# Altium PCB InWall_PCB3.PcbDoc
Units mm, origin at the board's own origin, x right, y up, seen from the top; angles counter-clockwise.
Board outline 51.7 x 50.3 mm, 2 copper layers (Top Layer, Bottom Layer); 34 components, 20 nets, 128 pads, 6 vias.
Unrouted connection lines stored in the file: 3.
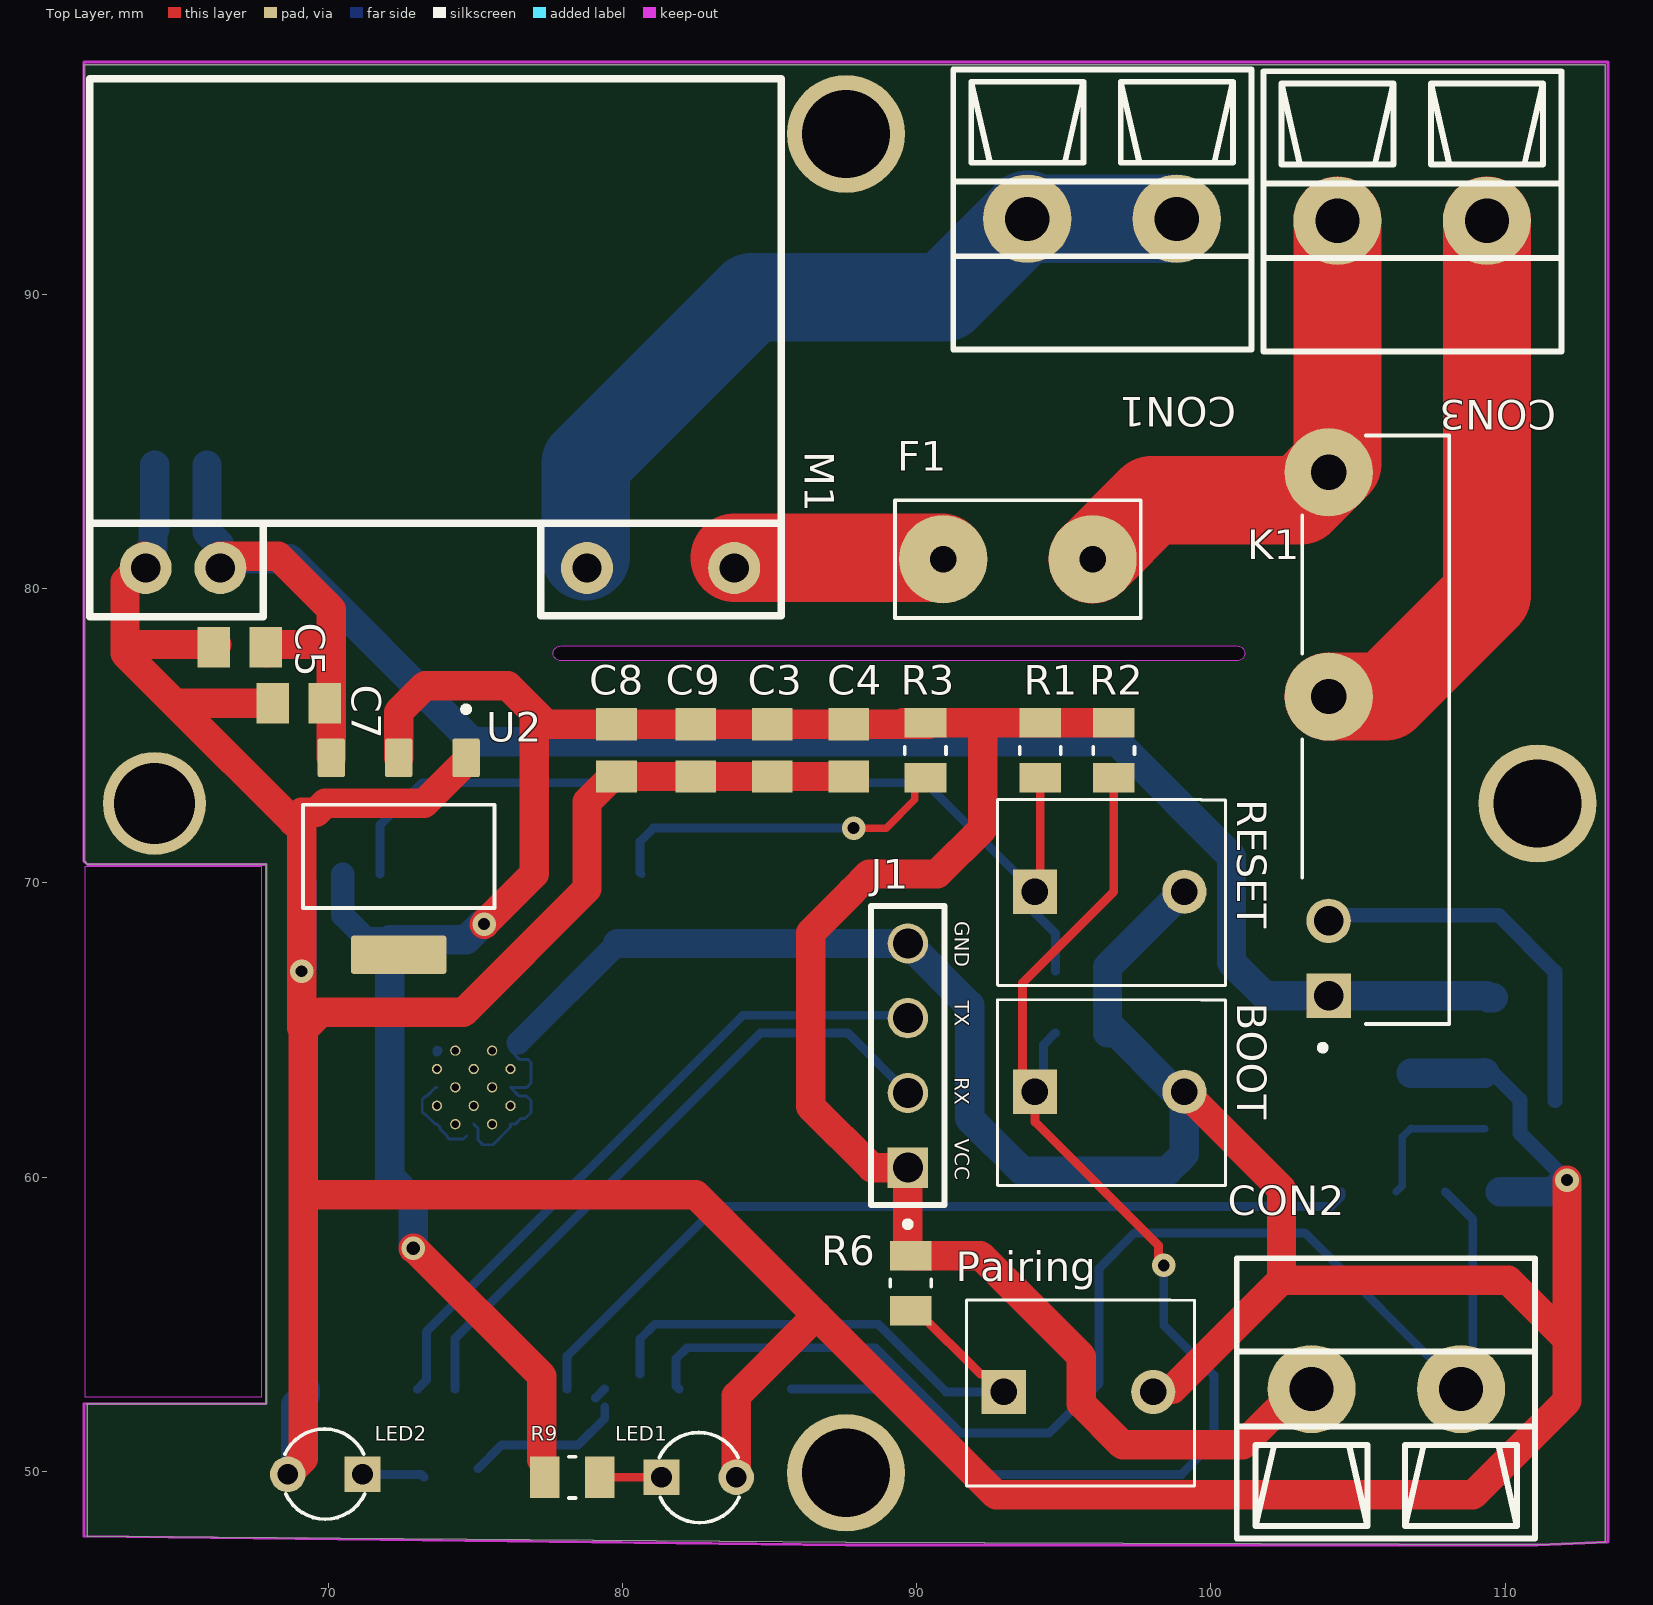
[diagram p0: Top Layer view]
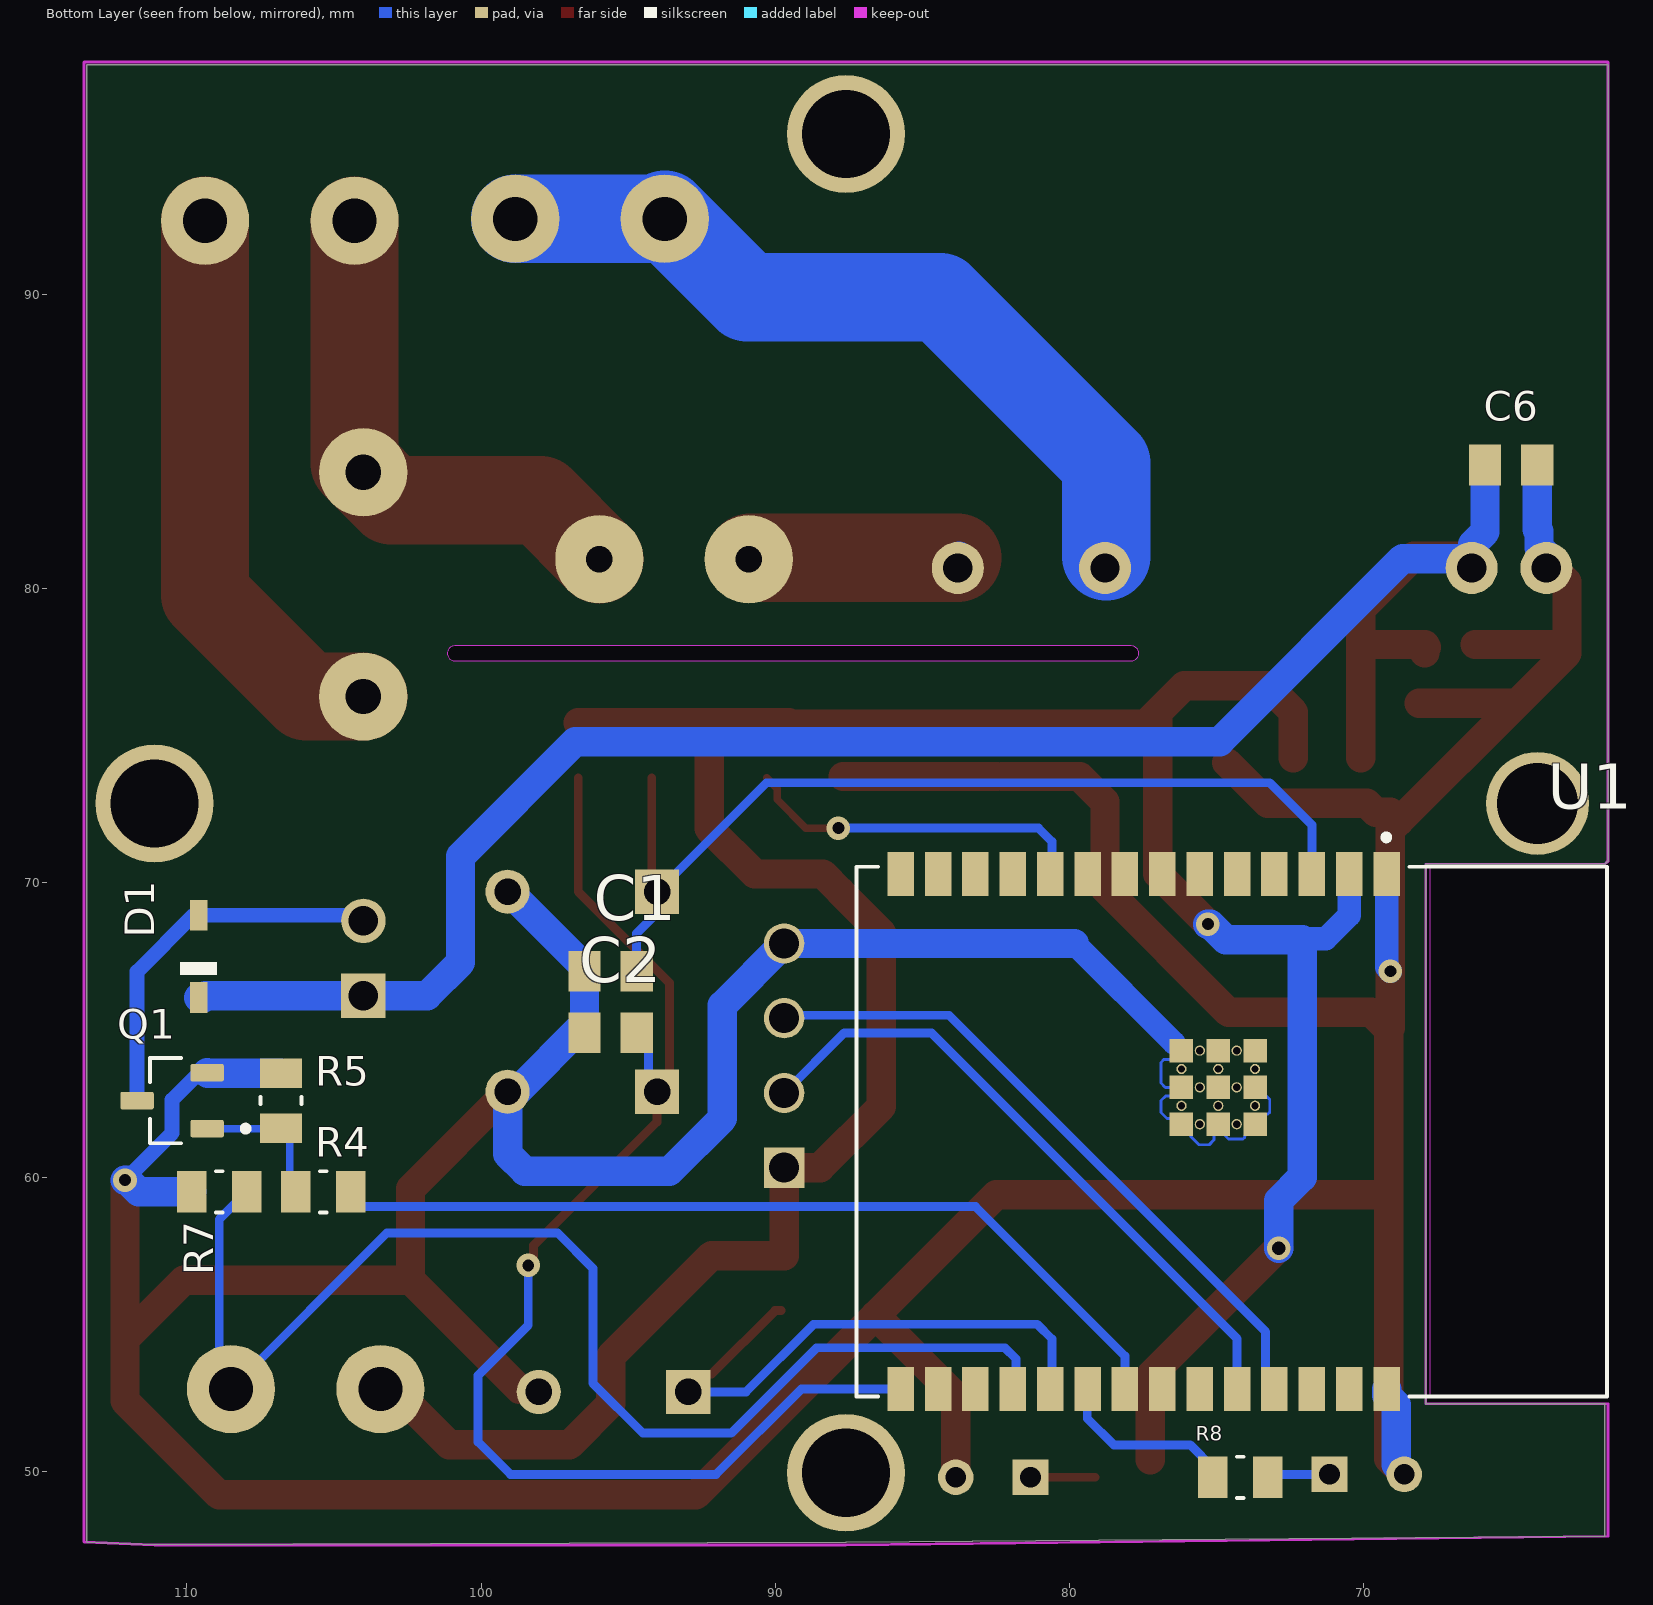
[diagram p1: Bottom Layer view, seen from below]
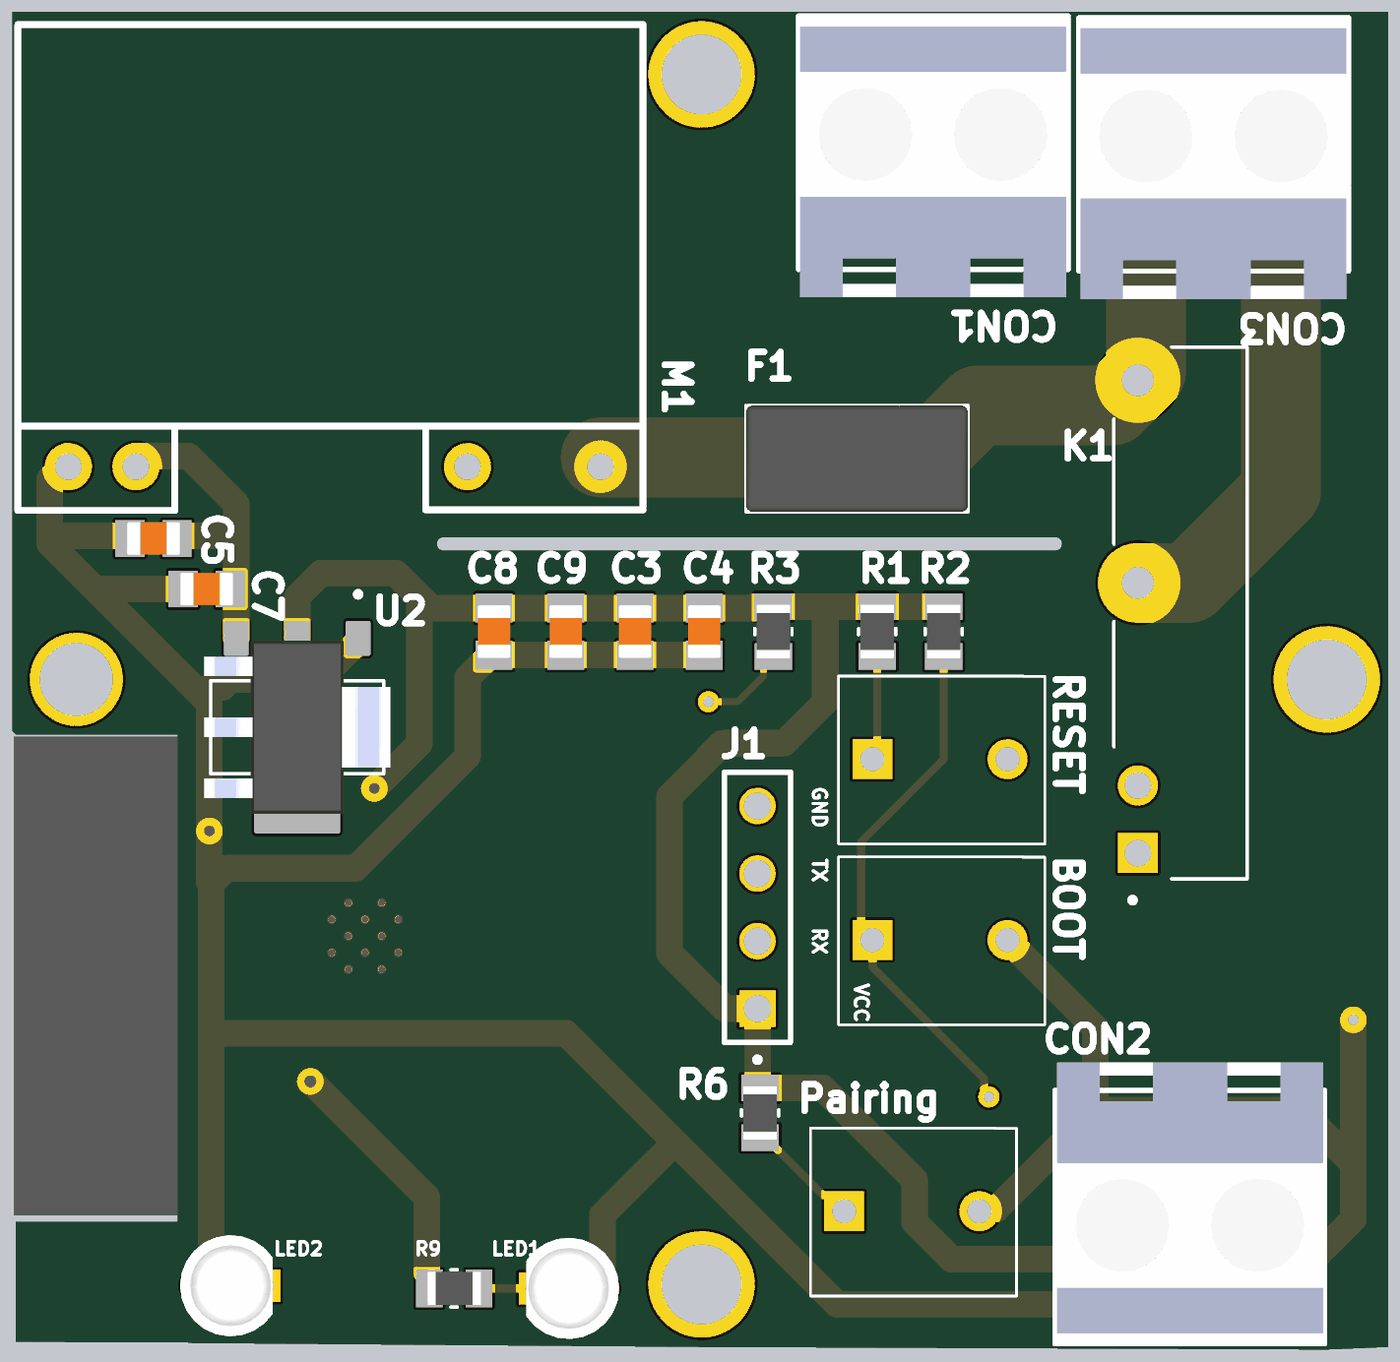
[diagram p2: 3D render of the assembled board from above, using the file's embedded part models]
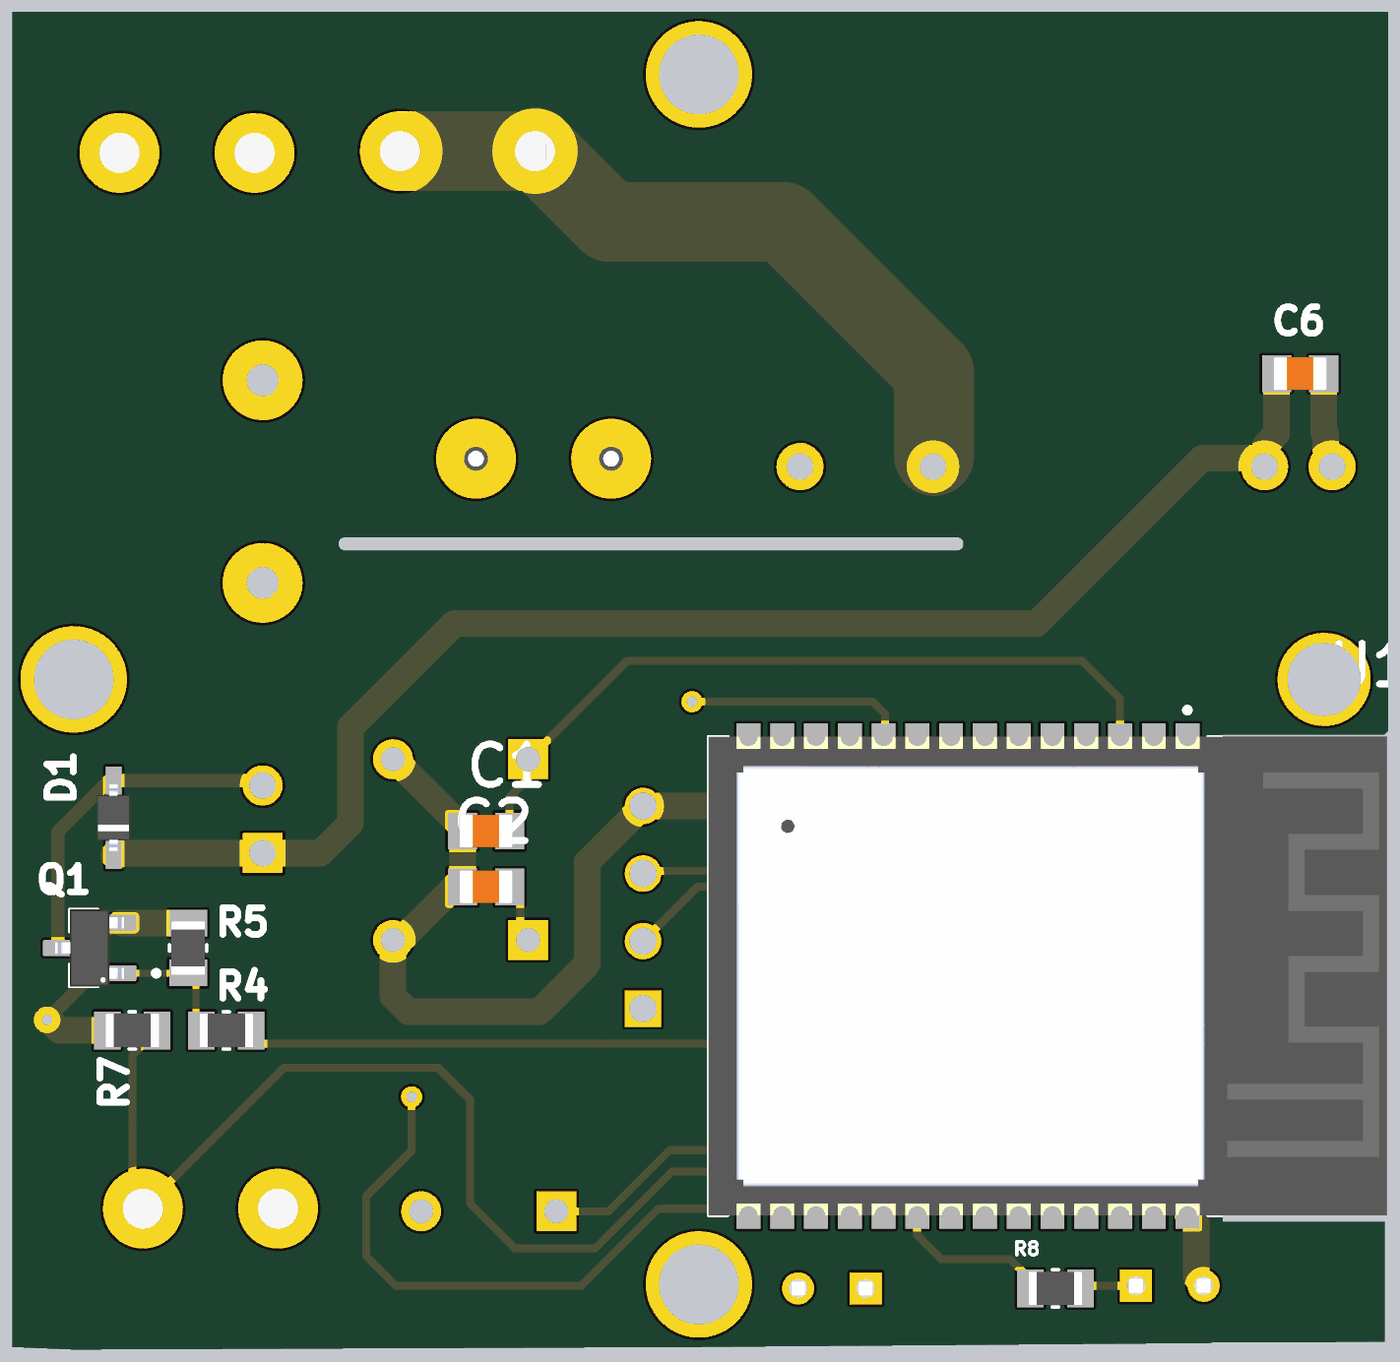
[diagram p3: 3D render of the assembled board from below, using the file's embedded part models]

## Layer stack, top to bottom
Top Solder: solder mask 0.0102, Solder Resist, Dk 3.5
Top Layer: signal copper 0.0356
Dielectric 1: dielectric 0.32, FR-4, Dk 4.8
Bottom Layer: signal copper 0.0356
Bottom Solder: solder mask 0.0102, Solder Resist, Dk 3.5

## Board outline
61.825,47.796 61.825,52.3 67.9,52.3 67.9,70.625 61.825,70.625 61.7,70.75 61.7,70.8 61.7,97.8 113.4,97.8 113.4,47.596 111.1,47.5 87.6,47.596
cut-out: 77.9,77.55 cw(c77.9,77.8) 77.9,78.05 100.9,78.05 cw(c100.9,77.8) 101.15,77.8 cw(c100.9,77.8) 100.9,77.55

## Design rules (kind name [scope] priority, off if disabled: settings)
Clearance [All] p1: gap=0.3 ignorepadtopadclearanceinfootprint=FALSE
PolygonConnect [All] p1: connectstyle=Relief reliefconductorwidth=0.254 reliefentries=4 polygonreliefangle="90 Angle" airgapwidth=0.254
RoutingVias [All] p1: holewidth=0.71 width=1.27 viastyle="Through Hole" minholewidth=0.4 minwidth=0.8 maxholewidth=1.5 maxwidth=1.27
SolderMaskExpansion [All] p1: expansion=0.102 istentingtop=FALSE
Width [All] p1: maxlimit=3.2 minlimit=0.1 preferedwidth=0.3 minimp=50.000000 maximp=50.000000 favimp=50.000000
30 further rules are at their usual default settings.

## Components (designator, comment, footprint, x,y, rotation, side; value= is the part's Value field where it differs from the comment)
BOOT "Push Button" "Push Button" 96.56,62.9 r270 top
C1 "100 nF" CAPC2012X90N 95.6,67 r180 bottom
C2 "100 nF" CAPC2012X90N 95.6,64.9 r180 bottom
C3 "100 nF/ 50V" CAPC2012X90N 85.1,74.5 r90 top
C4 "10 uF/ 25V" CAPC2012X90N 87.7,74.5 r90 top
C5 "100 nF/ 50V" CAPC2012X90N 67,78 r0 top
C6 "100 nF" CAPC2012X90N 65,84.2 r0 bottom
C7 "10 uF/ 25V" CAPC2012X90N 69,76.1 r0 top
C8 "10 uF/ 25V" CAPC2012X90N 79.8,74.5 r90 top
C9 "100 nF" CAPC2012X90N 82.5,74.5 r90 top
CON1 "CON2" TB_2 96.3,92.565 r180 top
CON2 "CON2" TB_2 105.96,52.8 r0 top
CON3 "CON2" TB_2 106.84,92.5 r180 top
D1 "1N4148WS" SODFL2512X100N 109.6,67.5 r90 bottom
F1 "0697H1000-02" FUSRR508W60L835T400H810 93.44,81 r180 top
J1 "HTSW-104-07-G-S" SAMTEC_HTSW-104-07-G-S 89.7,64.13 r270 top
K1 "HF49FD/005-1H12T" RELAY_HF49FD/005-1H12T 105.6,75.2 r90 top
LED1 "LED_Power" LEDRD254W50D305H520P 82.6,49.8 r0 top
LED2 "LED_Switch" LEDRD254W50D305H520P 69.9,49.9 r180 top
M1 "WX_DC12003" WX-DC12003 63.8,80.7 r0 top
Pairing "Push Button" "Push Button" 95.5,52.7 r270 top
Q1 "AO3400-5.8A" SOT95P260X140-3N 110.5,62.6 r0 bottom
R1 "10K" RESC2012X65N 94.2,74.5 r270 top
R2 "10K" RESC2012X65N 96.7,74.5 r270 top
R3 "3.3K" RESC2012X65N 90.3,74.5 r90 top
R4 "100 Ohm" RESC2012X65N 105.365,59.5 r0 bottom
R5 "10K" RESC2012X65N 106.8,62.6 r270 bottom
R6 "10K" RESC2012X65N 89.8,56.4 r270 top
R7 "10K" RESC2012X65N 108.9,59.5 r0 bottom
R8 "330" RESC2012X65N 74.2,49.8 r180 bottom
R9 "330" RESC2012X65N 78.3,49.8 r0 top
RESET "Push Button" "Push Button" 96.56,69.7 r270 top
U1 "ESP32-C6-WROOM-1-N8" XCVR_ESP32-C6-WROOM-1-N8 74.49,61.545 r270 bottom
U2 "AMS1117-3.3" SOT229P700X180-4N 72.4,70.9 r270 top

## Footprints (in the part's own frame and the unit in brackets; to place one, negate y for a bottom-side part, rotate by r counter-clockwise, add the part's x,y. Pads: shape width x height; smd on the part's side, far side on the other; paste and mask are expansions set on the pad)
CAPC2012X90N [mm]
  rect 1.1x1.38 smd: 1(-0.885,0) 2(0.885,0)
  body extent -1,-0.63 1,0.63, height 0.9
FUSRR508W60L835T400H810 [mm]
  round 3 hole 0.9: 1(-2.54,0) 2(2.54,0)
  silkscreen extent -4.18,-2 4.18,2, body extent -4.18,-2 4.18,2, height 8.1
LEDRD254W50D305H520P [mm]
  rect 1.208x1.208 / inner round 1.208 / far side rect 1.208x1.208 hole 0.7: A(-1.27,0)
  round 1.208 hole 0.7: C(1.27,0)
  silkscreen extent -1.34,-1.54 1.36,1.52, body extent -1.59,-1.9 1.91,1.9, height 6.71
"Push Button" [mm]
  rect 1.5x1.5 hole 0.9: 1(0,-2.54)
  round 1.5 hole 0.9: 2(0,2.54)
  silkscreen extent -3.13,-3.81 3.19,3.94
RELAY_HF49FD/005-1H12T [mm]
  rect 1.508x1.508 hole 1: 1(-9.03,1.6)
  round 1.508 hole 1: 2(-6.49,1.6)
  round 3 hole 1.2: 3(1.13,1.6) 4(8.75,1.6)
  silkscreen extent -10.9,-2.5 10,2.5
RESC2012X65N [mm]
  rect 1x1.42 smd: 1(-0.935,0) 2(0.935,0)
  silkscreen extent -0.12,-0.7 0.12,0.7, body extent -1,-0.63 1,0.63, height 0.65
SAMTEC_HTSW-104-07-G-S [mm]
  rect 1.37x1.37 / inner round 1.37 / far side rect 1.37x1.37 hole 1.02: 01(3.81,0)
  round 1.37 hole 1.02: 02(1.27,0) 03(-1.27,0) 04(-3.81,0)
  silkscreen extent -5.08,-1.24 5.83,1.24
SODFL2512X100N [mm]
  rect 1.05x0.6 smd: A(1.4,0) C(-1.4,0)
  silkscreen extent -0.63,-0.63 -0.2,0.63, body extent -1.25,-0.63 1.25,0.63, height 1.1
SOT95P260X140-3N [mm]
  rrect25% 1.14x0.6 smd: 1(-1.19,0.95) 2(-1.19,-0.95) 3(1.19,0)
  silkscreen extent -2.6,-1.45 0.75,1.45, body extent -1.3,-1.45 1.3,1.45, height 1.4
SOT229P700X180-4N [mm]
  rrect15% 1.31x0.93 smd: 1(-3.345,2.29) 2(-3.345,0) 3(-3.345,-2.29)
  rrect15% 1.31x3.24 smd: 4(3.345,0)
  silkscreen extent -5.1,-3.25 1.75,3.25, body extent -3.25,-3.5 3.25,3.5, height 1.8
TB_2 [mm]
  round 3 hole 1.5 mask+0.102: 1(-2.54,0) 2(2.54,0)
  silkscreen extent -5.08,-5.08 5.05,4.45, body extent -5,-5 5,5.5, height 14
WX-DC12003 [mm] "220V AC to 5V DC converter"
  round 1.77 hole 1: 1(0,0) 2(2.54,0) 3(15,0) 4(20,0)
  silkscreen extent -1.9,-1.65 21.6,16.63
XCVR_ESP32-C6-WROOM-1-N8 [mm]
  rect 1.5x0.9 smd: 1(-8.75,5.26) 2(-8.75,3.99) 3(-8.75,2.72) 4(-8.75,1.45) 5(-8.75,0.18) 6(-8.75,-1.09) 7(-8.75,-2.36) 8(-8.75,-3.63) 9(-8.75,-4.9) 10(-8.75,-6.17) 11(-8.75,-7.44) 12(-8.75,-8.71) 13(-8.75,-9.98) 14(-8.75,-11.25) 15(8.75,-11.25) 16(8.75,-9.98) 17(8.75,-8.71) 18(8.75,-7.44) 19(8.75,-6.17) 20(8.75,-4.9) 21(8.75,-3.63) 22(8.75,-2.36) 23(8.75,-1.09) 24(8.75,0.18) 25(8.75,1.45) 26(8.75,2.72) 27(8.75,3.99) 28(8.75,5.26)
  rect 0.8x0.8 smd: 29_1(-2.755,0.79) 29_2(-1.505,0.79) 29_3(-0.255,0.79) 29_4(-2.755,-0.46) 29_5(-1.505,-0.46) 29_6(-0.255,-0.46) 29_7(-2.755,-1.71) 29_8(-1.505,-1.71) 29_9(-0.255,-1.71)
  round 0.35 hole 0.25 mask+0: 30_1(-2.13,0.79) 30_2(-0.88,0.79) 30_3(-2.755,0.165) 30_4(-1.505,0.165) 30_5(-0.255,0.165) 30_6(-2.13,-0.46) 30_7(-0.88,-0.46) 30_8(-2.755,-1.085) 30_9(-1.505,-1.085) 30_10(-0.255,-1.085) 30_11(-2.13,-1.71) 30_12(-0.88,-1.71)
  Keep-Out Layer region: 9,6.75 -9,6.75 -9,12.75 9,12.75
  silkscreen extent -10.1,-12.75 9,12.75, body extent -9,-12.75 9,12.75, height 3.25

## Part data
C1 C2 C3 C4 C5 C6 C7 C8 C9: library part VJ0805Y104KXXCW1BC, "Capacitor: ceramic; MLCC; 100nF; 25V; X7R; Â±10%; SMD; 0805", Package="0805-2 VISHAY", Check_prices=https://www.snapeda.com/parts/VJ0805Y104KXXCW1BC/Vishay/view-part/?ref=eda, MF="Vishay Vitramon", MP=VJ0805Y104KXXCW1BC, SnapEDA_Link=https://www.snapeda.com/parts/VJ0805Y104KXXCW1BC/Vishay/view-part/?ref=snap
D1: "Diode Standard 75V 300mA (DC) Surface Mount SOD-323", Package="SOD-323FL-2 ON Semiconductor", Availability="In Stock", MF="ON Semiconductor", MP=1N4148WS, Price=None, Purchase-URL=https://pricing.snapeda.com/search/part/1N4148WS/?ref=eda
F1: "2-Pin Radial Fuse", Package="Radial Box  Bel Fuse", Check_prices=https://www.snapeda.com/parts/0697H1000-02/Bel+Circuit+Protection/view-part/?ref=eda, MF="Bel Fuse", MP=0697H1000-02, SnapEDA_Link=https://www.snapeda.com/parts/0697H1000-02/Bel+Circuit+Protection/view-part/?ref=snap
J1 Q1: Package=None, Availability=Unavailable, Price=None
  J1: MP=HTSW-104-07-G-S
  Q1: MF="{'manufacturer': u'MDD'}", MP=AO3400-5.8A
K1: "Relay: electromagnetic; SPST-NO; Ucoil: 5VDC; 5A/250VAC; 5A/30VDC", Package=None, Availability=Unavailable, MF=Hongfa, MP=HF49FD/005-1H12T, Price=None, SnapEDA_Link=https://www.snapeda.com/parts/HF49FD/005-1H12T/Hongfa/view-part/2753221/?ref=snap
LED1 LED2: library part OVLAW4CB7, "Ovlaw4Cb7 White LED 3mm (T-1) Round Lens Through Hole Package", Package=Package, Check_prices=https://www.snapeda.com/parts/OVLAW4CB7/TT+Electronics%252FOptek/view-part/?ref=eda, MF="TT Electronics/Optek", MP=OVLAW4CB7, SnapEDA_Link=https://www.snapeda.com/parts/OVLAW4CB7/TT+Electronics%252FOptek/view-part/?ref=snap
R1 R2 R3 R4 R5 R6 R7 R8 R9: library part RN73C2A5K11BTD, "RES SMD 5.11KOHM 0.1% 1/10W 0805", Package=0805, Power_Rating=".1 W", Resistance=5.11K, Tolerance=.1%, Check_prices=https://www.snapeda.com/parts/RN73C2A5K11BTD/TE+Connectivity+Passive+Product/view-part/?ref=eda, EU_RoHS_Compliance=Compliant, MF="TE Connectivity", MP=RN73C2A5K11BTD, SnapEDA_Link=https://www.snapeda.com/parts/RN73C2A5K11BTD/TE+Connectivity+Passive+Product/view-part/?ref=snap
U1: "Multiprotocol Modules ESP32-C6 module, Wi-Fi 6 in 2.4 GHz band, Bluetooth 5, Zigbee 3.0 and Thread. ESP34-WROOM Compatible - ENGINEERING SAMPLE", Package="SMD-28 Espressif Systems", Check_prices=https://www.snapeda.com/parts/ESP32-C6-WROOM-1-N8/Espressif+Systems/view-part/?ref=eda, MF="Espressif Systems", MP=ESP32-C6-WROOM-1-N8, SnapEDA_Link=https://www.snapeda.com/parts/ESP32-C6-WROOM-1-N8/Espressif+Systems/view-part/?ref=snap
U2: "Sot223/Pkg 1-Amp 3.3-Volt Low Drop Out Voltage Regulatator", Package="SOT-223 Seeed Technology", Check_prices=https://www.snapeda.com/parts/AMS1117-3.3/Advanced+Monolithic+Systems/view-part/?ref=eda, MF="Advanced Monolithic Systems", MP=AMS1117-3.3, SnapEDA_Link=https://www.snapeda.com/parts/AMS1117-3.3/Advanced+Monolithic+Systems/view-part/?ref=snap

## Free pads (board coordinates)
  round 4 hole 3: 1(87.6,95.45) 2(111.1,72.7) 3(87.6,49.95)
  round 3.5 hole 2.75: 4(64.1,72.7)

## Via types
v1: diameter 0.8, hole 0.4, Top Layer to Bottom Layer, 5 vias
v2: diameter 0.8, hole 0.45, Top Layer to Bottom Layer, 1 vias

## Nets (pads, with @x,y where several pads share a name; then routed paths per layer and width w, separated by ;. In a path a pad name is that pad's centre, name@x,y a point inside that pad or via, vN(x,y) a via of type N, cw(c..) or ccw(c..) an arc to the next point about the centre after c; other vN are vias at no path point)
3V3: C3.2 C4.2 C8.2 C9.2 CON2.1 J1.01 R1.1 R2.1 R3.2 R6.1 R9.1 U1.2 U2.2 | length 104.2
  Top Layer w1: U2.2 72.4,75.8 73.3,76.7 76.1,76.7 77,75.8 ; v2(72.895,57.584) 72.916,57.584 77.265,53.235 R9.1@77.265,50.4 ; v1(75.3,68.6) 77,70.3 77,75.8 ; R3.2@90.4,75.385 89.5,75.385 ; R2.1 R1.1 92.25,75.435 ; CON2.1 102.977,52.8 101.077,50.9 97,50.9 95.6,52.3 95.6,53.9 92.165,57.335 R6.1 89.7,57.335 J1.01 88.48,60.32 86.4,62.4 86.4,68.3 87.8,69.7 87.8,69.714 88.386,70.3 90.7,70.3 92.25,71.85 92.25,75.435 ; 77,75.8 77.415,75.385 C8.2 C9.2 C3.2 C4.2 89.5,75.385 ; 89.5,75.385 89.55,75.435 R3.2 92.25,75.435
  Bottom Layer w0.8: U1.2 70.5,68.9 71.3,68.1 72.064,68.1 72.1,68.064
  Bottom Layer w1: v2(72.895,57.584) 72.895,59.205 72.1,60 72.1,68.064 74.691,68.064 75.227,68.6 v1(75.3,68.6)
5V: C5.2 C6.2 C7.2 D1.C K1.1 M1.2 U2.3 | length 67.1
  Top Layer w0.254: C5.2@67.885,77.86 C5.2
  Top Layer w1: M1.2@66.3,81.1 68.3,81.1 70.11,79.29 70.11,78 ; C5.2 C5.2@67.935,78 ; C5.2@67.935,77.81 C5.2@67.935,78 ; C5.2@67.935,78.1 C5.2@67.935,78 ; C5.2@68.035,78.1 70.01,78.1 70.11,78 ; U2.3 70.11,76.1 70.11,78
  Bottom Layer w1: C6.2 65.885,81.925 66.3,81.51 66.3,81.1 66.385,81.015 68.685,81.015 74.9,74.8 96.8,74.8 100.7,70.9 100.7,67.3 101.83,66.17 K1.1 109.355,66.17 109.425,66.1 D1.C
BOOT: BOOT.1 C2.2 R2.2 U1.15 | length 44.9
  Top Layer w0.3: BOOT.1@93.6,62.3 94.024,62.3 94.024,61.876 98.214,57.686 98.214,57.186 v1(98.4,57) ; BOOT.1 93.6,63.32 93.6,66.6 96.7,69.7 R2.2
  Bottom Layer w0.3: U1.15 89.122,52.795 92.017,49.9 99,49.9 100.1,51 100.1,53.269 98.4,54.969 v1(98.4,57) ; BOOT.1@93.8,62.8 94.315,63.315 94.315,64.5 C2.2
EN: C1.2 R1.2 RESET.1 U1.3 | length 32
  Top Layer w0.3: RESET.1 94.2,69.88 R1.2
  Bottom Layer w0.3: U1.3 71.77,71.97 73.2,73.4 90.3,73.4 RESET.1@93.8,69.9 ; RESET.1@94,69 94.715,68.285 C1.2
GND: BOOT.2 C1.1 C2.1 C3.1 C4.1 C5.1 C6.1 C7.1 C8.1 C9.1 J1.04 LED1.C LED2.C M1.1 Pairing.2 Q1.2 R5.1 R7.2 RESET.2 U1.1 U1.28 U1.29_1 U1.29_2 U1.29_3 U1.29_4 U1.29_5 U1.29_6 U1.29_7 U1.29_8 U1.29_9 U2.1 | length 228.2
  Top Layer w1: M1.1@63.76,81.1 63.76,80.892 63.1,80.232 63.1,77.8 ; C5.1@66.215,78.1 63.4,78.1 63.1,77.8 ; C7.1 64.8,76.1 ; LED2.C 69.161,50.431 69.161,59.4 ; U2.1@74.655,74.09 73.265,72.7 69.9,72.7 69.6,72.4 69.1,72.4 69.1,71.8 ; C9.1@82.3,73.615 C8.1 79.66,73.615 78.8,72.755 78.8,69.8 74.6,65.6 69.747,65.6 69.161,65.014 ; C9.1 C3.1 C4.1 ; LED1.C 83.87,52.57 86.6,55.3 ; Pairing.2 98.136,52.796 98.696,52.796 102.4,56.5 ; BOOT.2@99.263,62.737 102.4,59.6 102.4,56.5 ; v1(112.1,59.9) 112.1,54.5 ; 63.1,77.8 64.8,76.1 ; 64.8,76.1 68.8,72.1 69.1,71.8 ; 69.1,71.8 v1(69.1,67) 69.1,65.075 69.161,65.014 ; 69.161,59.4 69.161,65.014 ; 69.161,59.4 82.5,59.4 86.6,55.3 ; 86.6,55.3 92.7,49.2 108.9,49.2 112.1,52.4 112.1,54.5 ; 102.4,56.5 110.1,56.5 112.1,54.5
  Bottom Layer w0.1: U1.29_2 73.648,63.05 73.35,62.752 73.311,62.752 73.2,62.641 73.2,62.209 73.259,62.15 73.298,62.15 73.648,61.8 U1.29_3 73.8,61.7 73.8,61.648 74.05,61.398 74.05,61.359 74.109,61.3 74.6,61.3 74.7,61.4 ; U1.29_6 75.1,61.65 75.1,61.259 75.259,61.1 75.6,61.1 76.2,61.7 U1.29_9 76.359,61.8 76.55,61.991 76.691,61.991 76.9,62.2 76.9,62.6 76.748,62.752 76.498,62.752 U1.29_8 76.75,63.05 76.9,63.2 76.9,63.9 76.798,64.002 76.498,64.002 U1.29_7
  Bottom Layer w0.254: U1.29_1@73.7,64.231 U1.29_1@73.7,64.254
  Bottom Layer w0.3: U1.29_1@73.7,64.254 U1.29_1 U1.29_1@73.746,64.3
  Bottom Layer w0.5: Q1.2 109.36,63.5 109.63,63.5 110.5,62.63 110.5,61.5 v1(112.1,59.9)
  Bottom Layer w0.8: v1(69.1,67) 69.23,67.13 69.23,70.015 U1.1@69.2,70.045 ; U1.29_7@76.465,64.565 79.84,67.94
  Bottom Layer w1: M1.1@63.76,81.1 64.05,81.39 64.05,81.942 64.115,82.007 C6.1 ; LED2.C 68.63,49.956 68.9,50.226 68.9,52.265 69.23,52.595 U1.28 ; 79.84,67.94 J1.04 91.8,65.84 91.8,62 93.6,60.2 98.514,60.2 99.1,60.786 BOOT.2 ; C2.1@96.535,64.95 C2.1 C1.1 96.485,67.14 99.045,69.7 RESET.2 RESET.2@99.004,69.604 ; C2.1@96.535,65.165 BOOT.2@98.8,62.9 ; R5.1 109.295,63.535 Q1.2 ; R7.2 111.627,59.5 112.027,59.9 v1(112.1,59.9)
L_out: CON3.1 K1.3 | length 19.5
  Top Layer w3: K1.3 105.93,76.33 109.38,79.78 CON3.1
LED: R8.1 U1.20 | length 5.8
  Bottom Layer w0.3: R8.1@75.1,50.1 75.9,50.9 78.5,50.9 79.4,51.8 U1.20@79.4,52.2 ; U1.20@79.09,52.495 U1.20
NetD1_A: D1.A K1.2 Q1.3 | length 12.9
  Bottom Layer w0.5: K1.2 104.097,68.807 104.456,68.807 104.549,68.9 109.775,68.9 111.69,66.985 Q1.3
NetF1_2: F1.2 M1.4 | length 7.2
  Top Layer w3: M1.4@83.81,81.05 F1.2@90.85,81.05
  Bottom Layer w1: M1.4@83.76,81.1 M1.4@83.81,81.05 ; F1.2@90.85,81.05 F1.2
NetLED1_A: LED1.A R9.2 | length 2.2
  Top Layer w0.3: R9.2@79.135,49.8 LED1.A
NetLED2_A: LED2.A R8.2 | length 2.1
  Bottom Layer w0.3: LED2.A 73.165,49.9 R8.2
NetQ1_1: Q1.1 R4.2 R5.2 | length 4.9
  Bottom Layer w0.254: R4.2 106.5,59.7 106.5,61.365 R5.2 106.815,61.65 Q1.1
NetR3_1: R3.1 U1.10 | length 11.9
  Top Layer w0.254: v1(87.858,71.86) 88.96,71.86 89.933,72.833 89.933,73.198 R3.1
  Bottom Layer w0.254: U1.10@80.605,70.35 U1.10
  Bottom Layer w0.3: U1.10@80.605,70.35 80.605,71.405 81.06,71.86 v1(87.858,71.86)
NULL: CON1.1 CON1.2 M1.3 | length 26.9
  Top Layer w2.5: CON1.2@93.76,92.429 CON1.2 ; CON1.1 CON1.1@98.89,92.515
  Bottom Layer w3: M1.3@78.76,81.1 78.76,84.26 84.4,89.9 90.96,89.9 CON1.2@93.76,92.7 ; CON1.2 CON1.1
Pairing: Pairing.1 R6.2 U1.19 | length 19
  Top Layer w0.3: R6.2 90.01,55.465 92.175,53.3 92.36,53.3 Pairing.1
  Bottom Layer w0.3: U1.19@80.6,53.3 80.6,54.5 81.1,55 88.7,55 91,52.7 Pairing.1
Phase: CON3.2 F1.1 K1.4 | length 17.9
  Top Layer w3: F1.1 97.98,83 103.05,83 104.3,84.25 CON3.2
Relay_Signal: R4.1 U1.21 | length 29.8
  Bottom Layer w0.3: U1.21 78.12,53.92 83.2,59 104.08,59 104.43,59.35 R4.1
RXD: J1.02 U1.24 | length 22.3
  Bottom Layer w0.3: U1.24 74.31,54.51 84.7,64.9 87.66,64.9 J1.02
S1: CON2.2 R7.1 U1.18 | length 43.1
  Bottom Layer w0.3: U1.18 81.819,52.906 81.819,53.819 82.2,54.2 88.6,54.2 91.5,51.3 94.5,51.3 96.2,53 96.2,56.9 97.4,58.1 103.2,58.1 CON2.2 ; R7.1 108.9,58.565 CON2.2@108.9,53.2
TXD: J1.03 U1.25 | length 22.9
  Bottom Layer w0.3: U1.25 73.34,53.095 73.34,54.74 84.1,65.5 89.6,65.5 J1.03
pads on no net: U1.4 U1.5 U1.6 U1.7 U1.8 U1.9 U1.11 U1.12 U1.13 U1.14 U1.16 U1.17 U1.22 U1.23 U1.26 U1.27 U1.30_1 U1.30_2 U1.30_3 U1.30_4 U1.30_5 U1.30_6 U1.30_7 U1.30_8 U1.30_9 U1.30_10 U1.30_11 U1.30_12 U2.4

## Keep-outs
Keep-Out Layer:
  lines w0.1: 61.7,70.8 61.7,97.9 113.5,97.9 113.5,97.5 113.5,72.8 113.5,72.5 113.5,47.6 111.1,47.5 87.6,47.5 61.7,47.797 61.7,48.2 61.7,52.3 67.9,52.3 67.9,70.385 67.9,70.625 61.825,70.625 61.7,70.75 61.7,70.8 ; 61.7,70.8 61.7,70.8

## Silkscreen, mask and mechanical layers (free items; w line width, h text height)
Top Overlay:
  text "GND" at 91.3,68.7 h0.5 r270
  text "TX" at 91.3,66 h0.5 r270
  text "RX" at 91.3,63.4 h0.5 r270
  text "VCC" at 91.3,61.3 h0.5 r270
Mechanical 1:
  lines w0.5: 77.9,77.8 100.9,77.8